# Altium PCB FA TOOL 20131212_V2.0.PcbDoc (part 1 of 2)
Units mm, origin at the board's own origin, x right, y up, seen from the top; angles counter-clockwise.
Board outline 121.5 x 90 mm, 4 copper layers (Top Layer, Mid-Layer 1, Mid-Layer 2, Bottom Layer); 249 components, 157 nets, 678 pads, 153 vias.
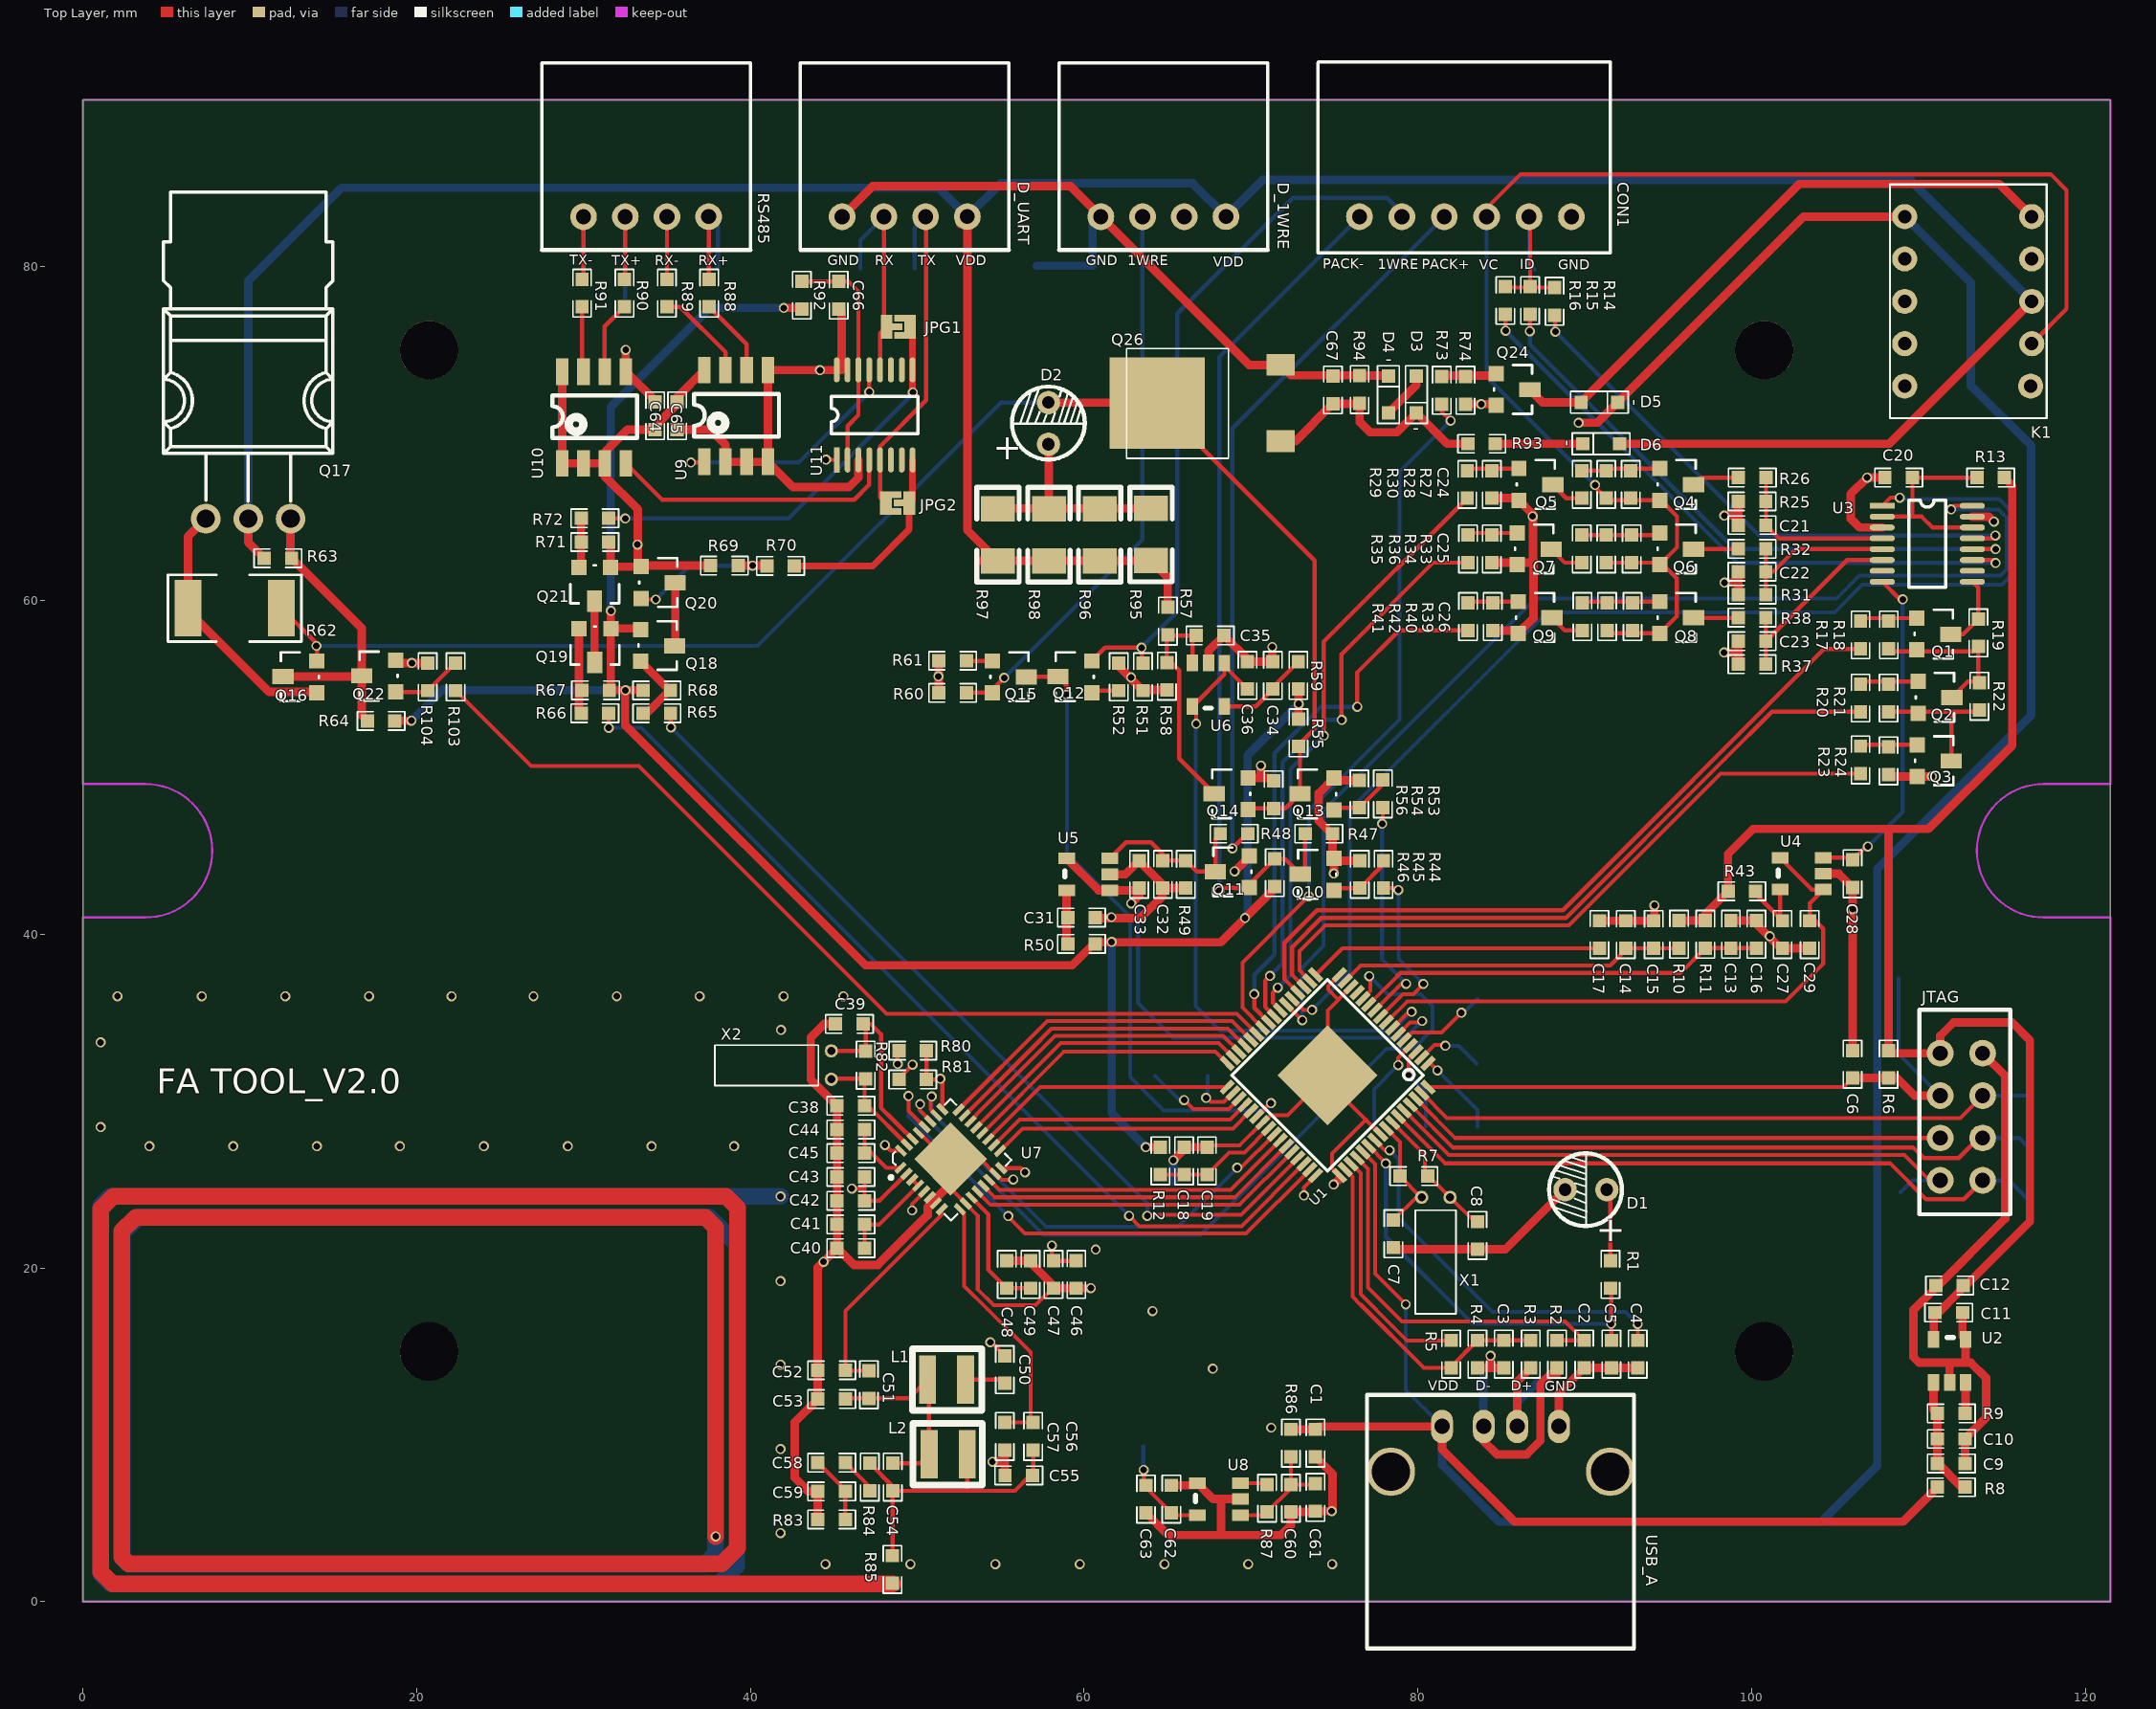
[diagram p0: Top Layer view]
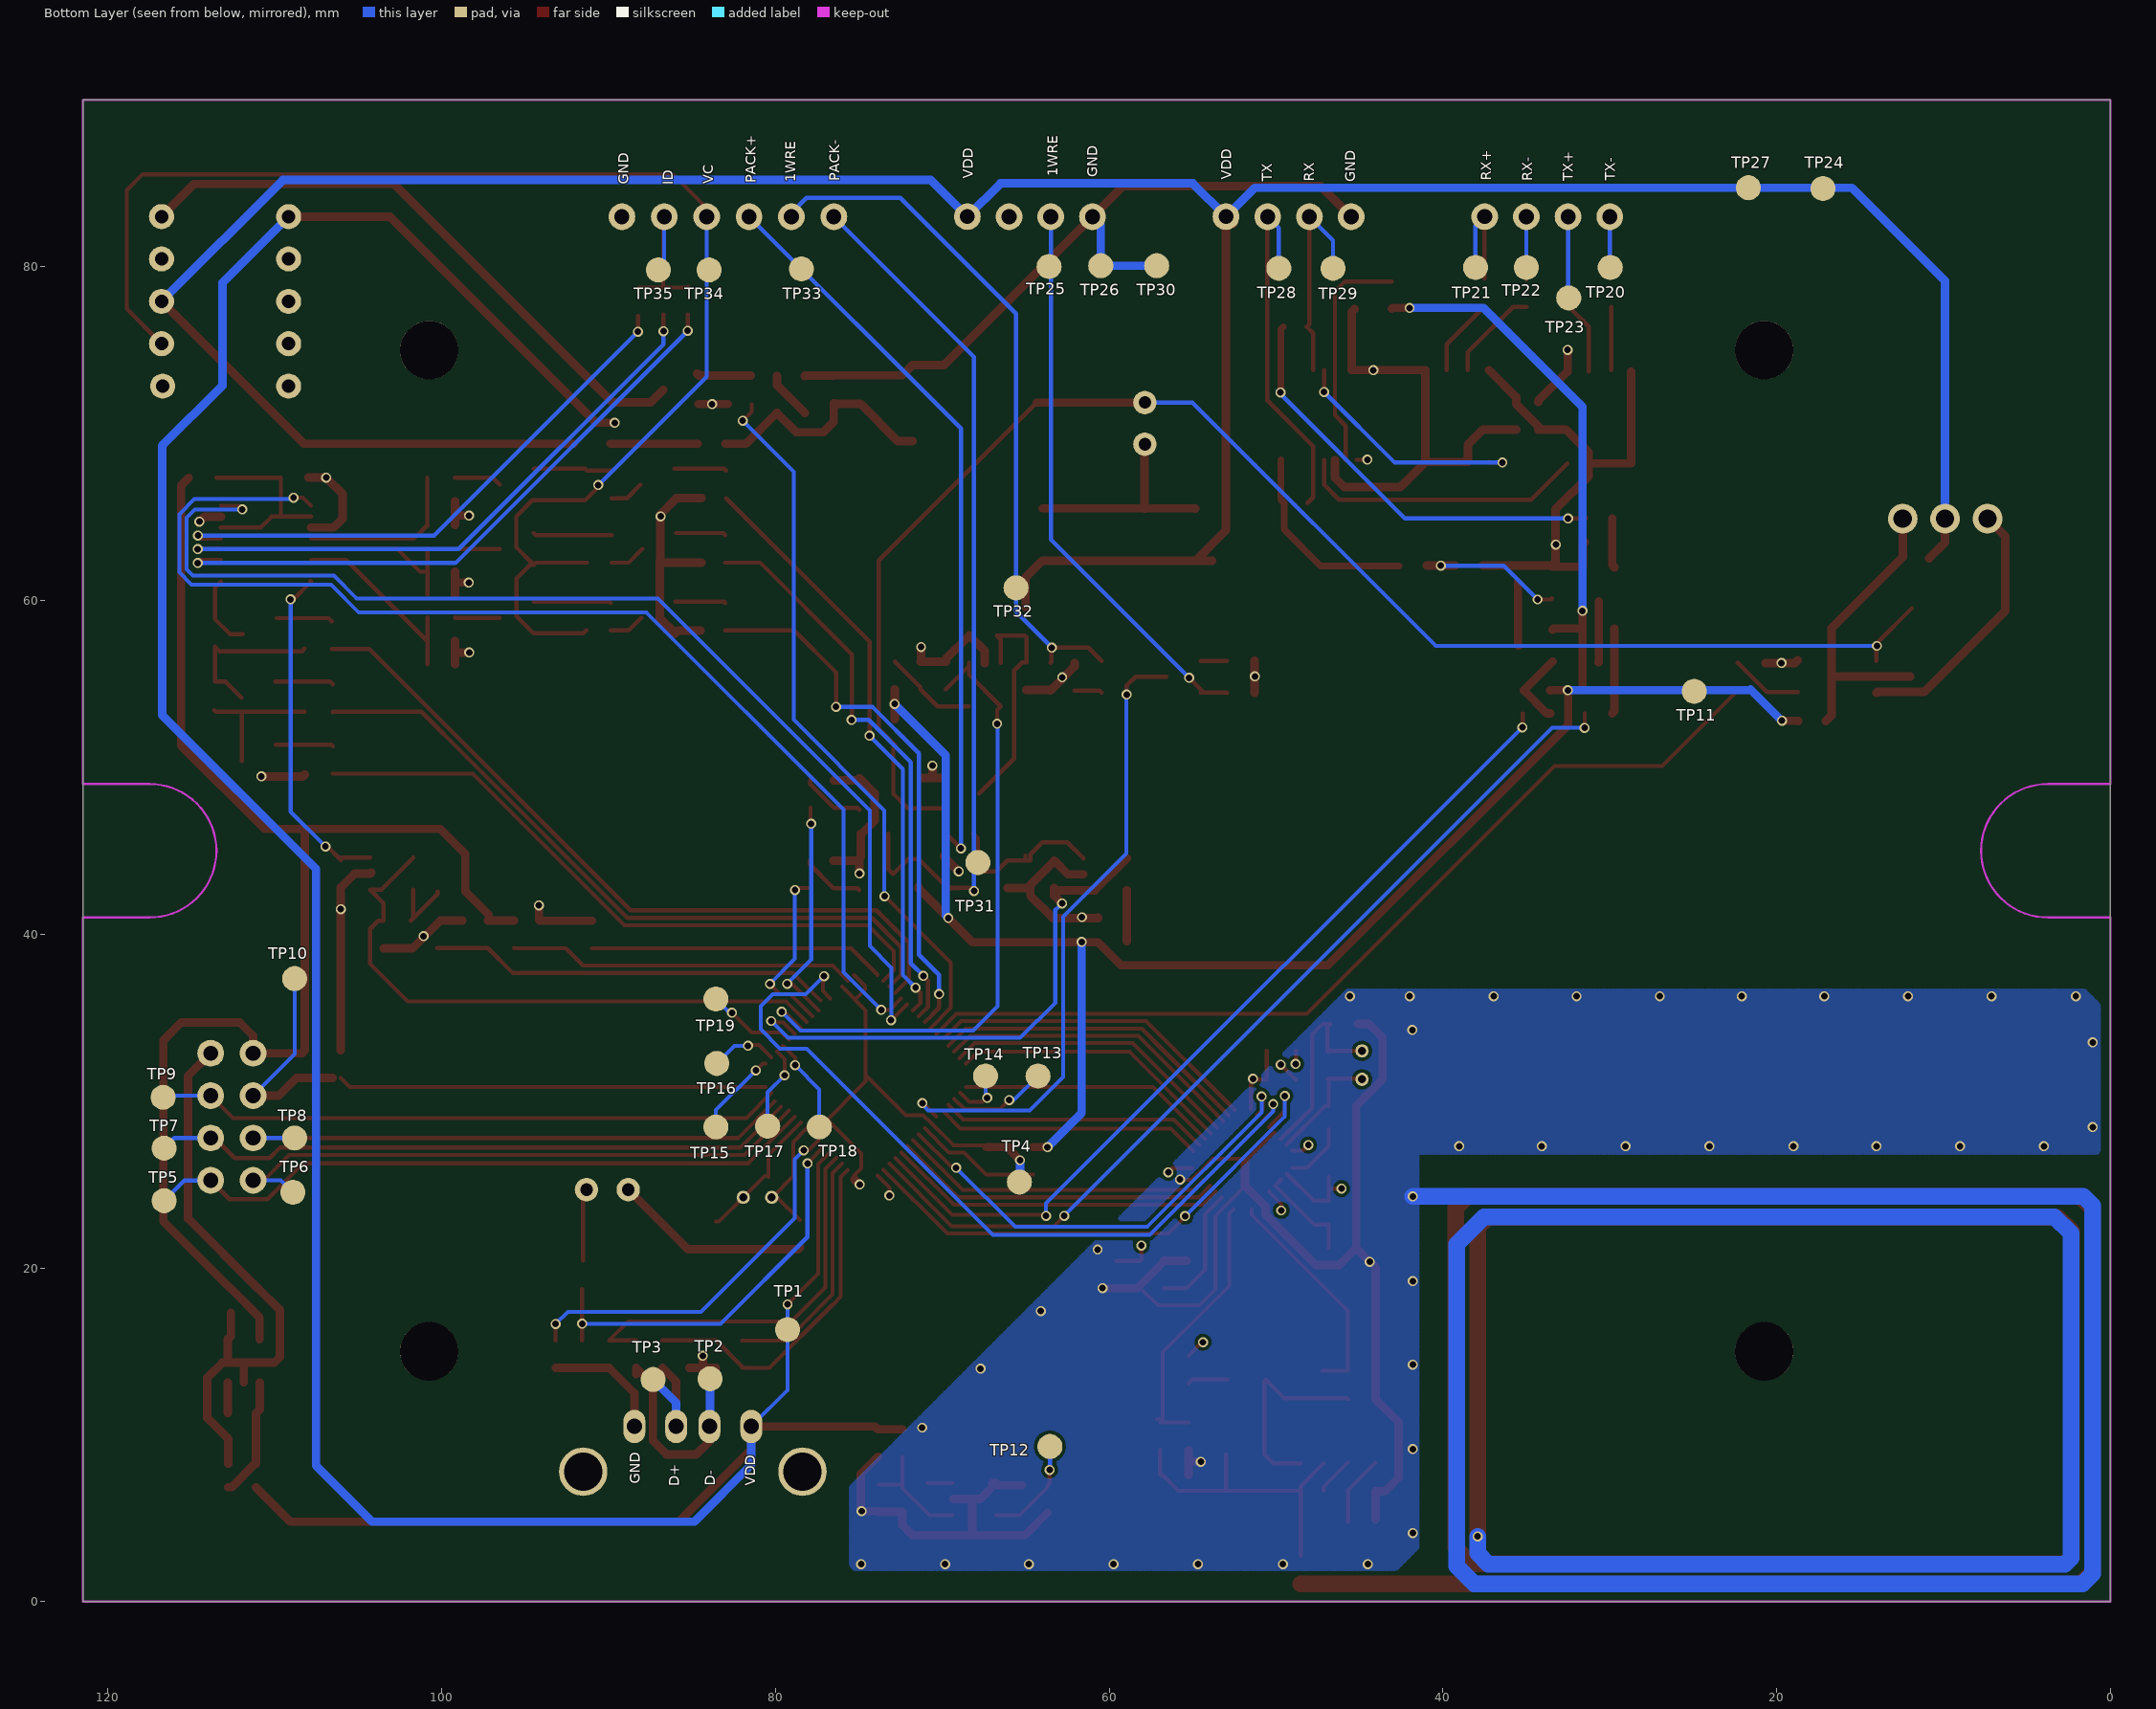
[diagram p1: Bottom Layer view, seen from below]
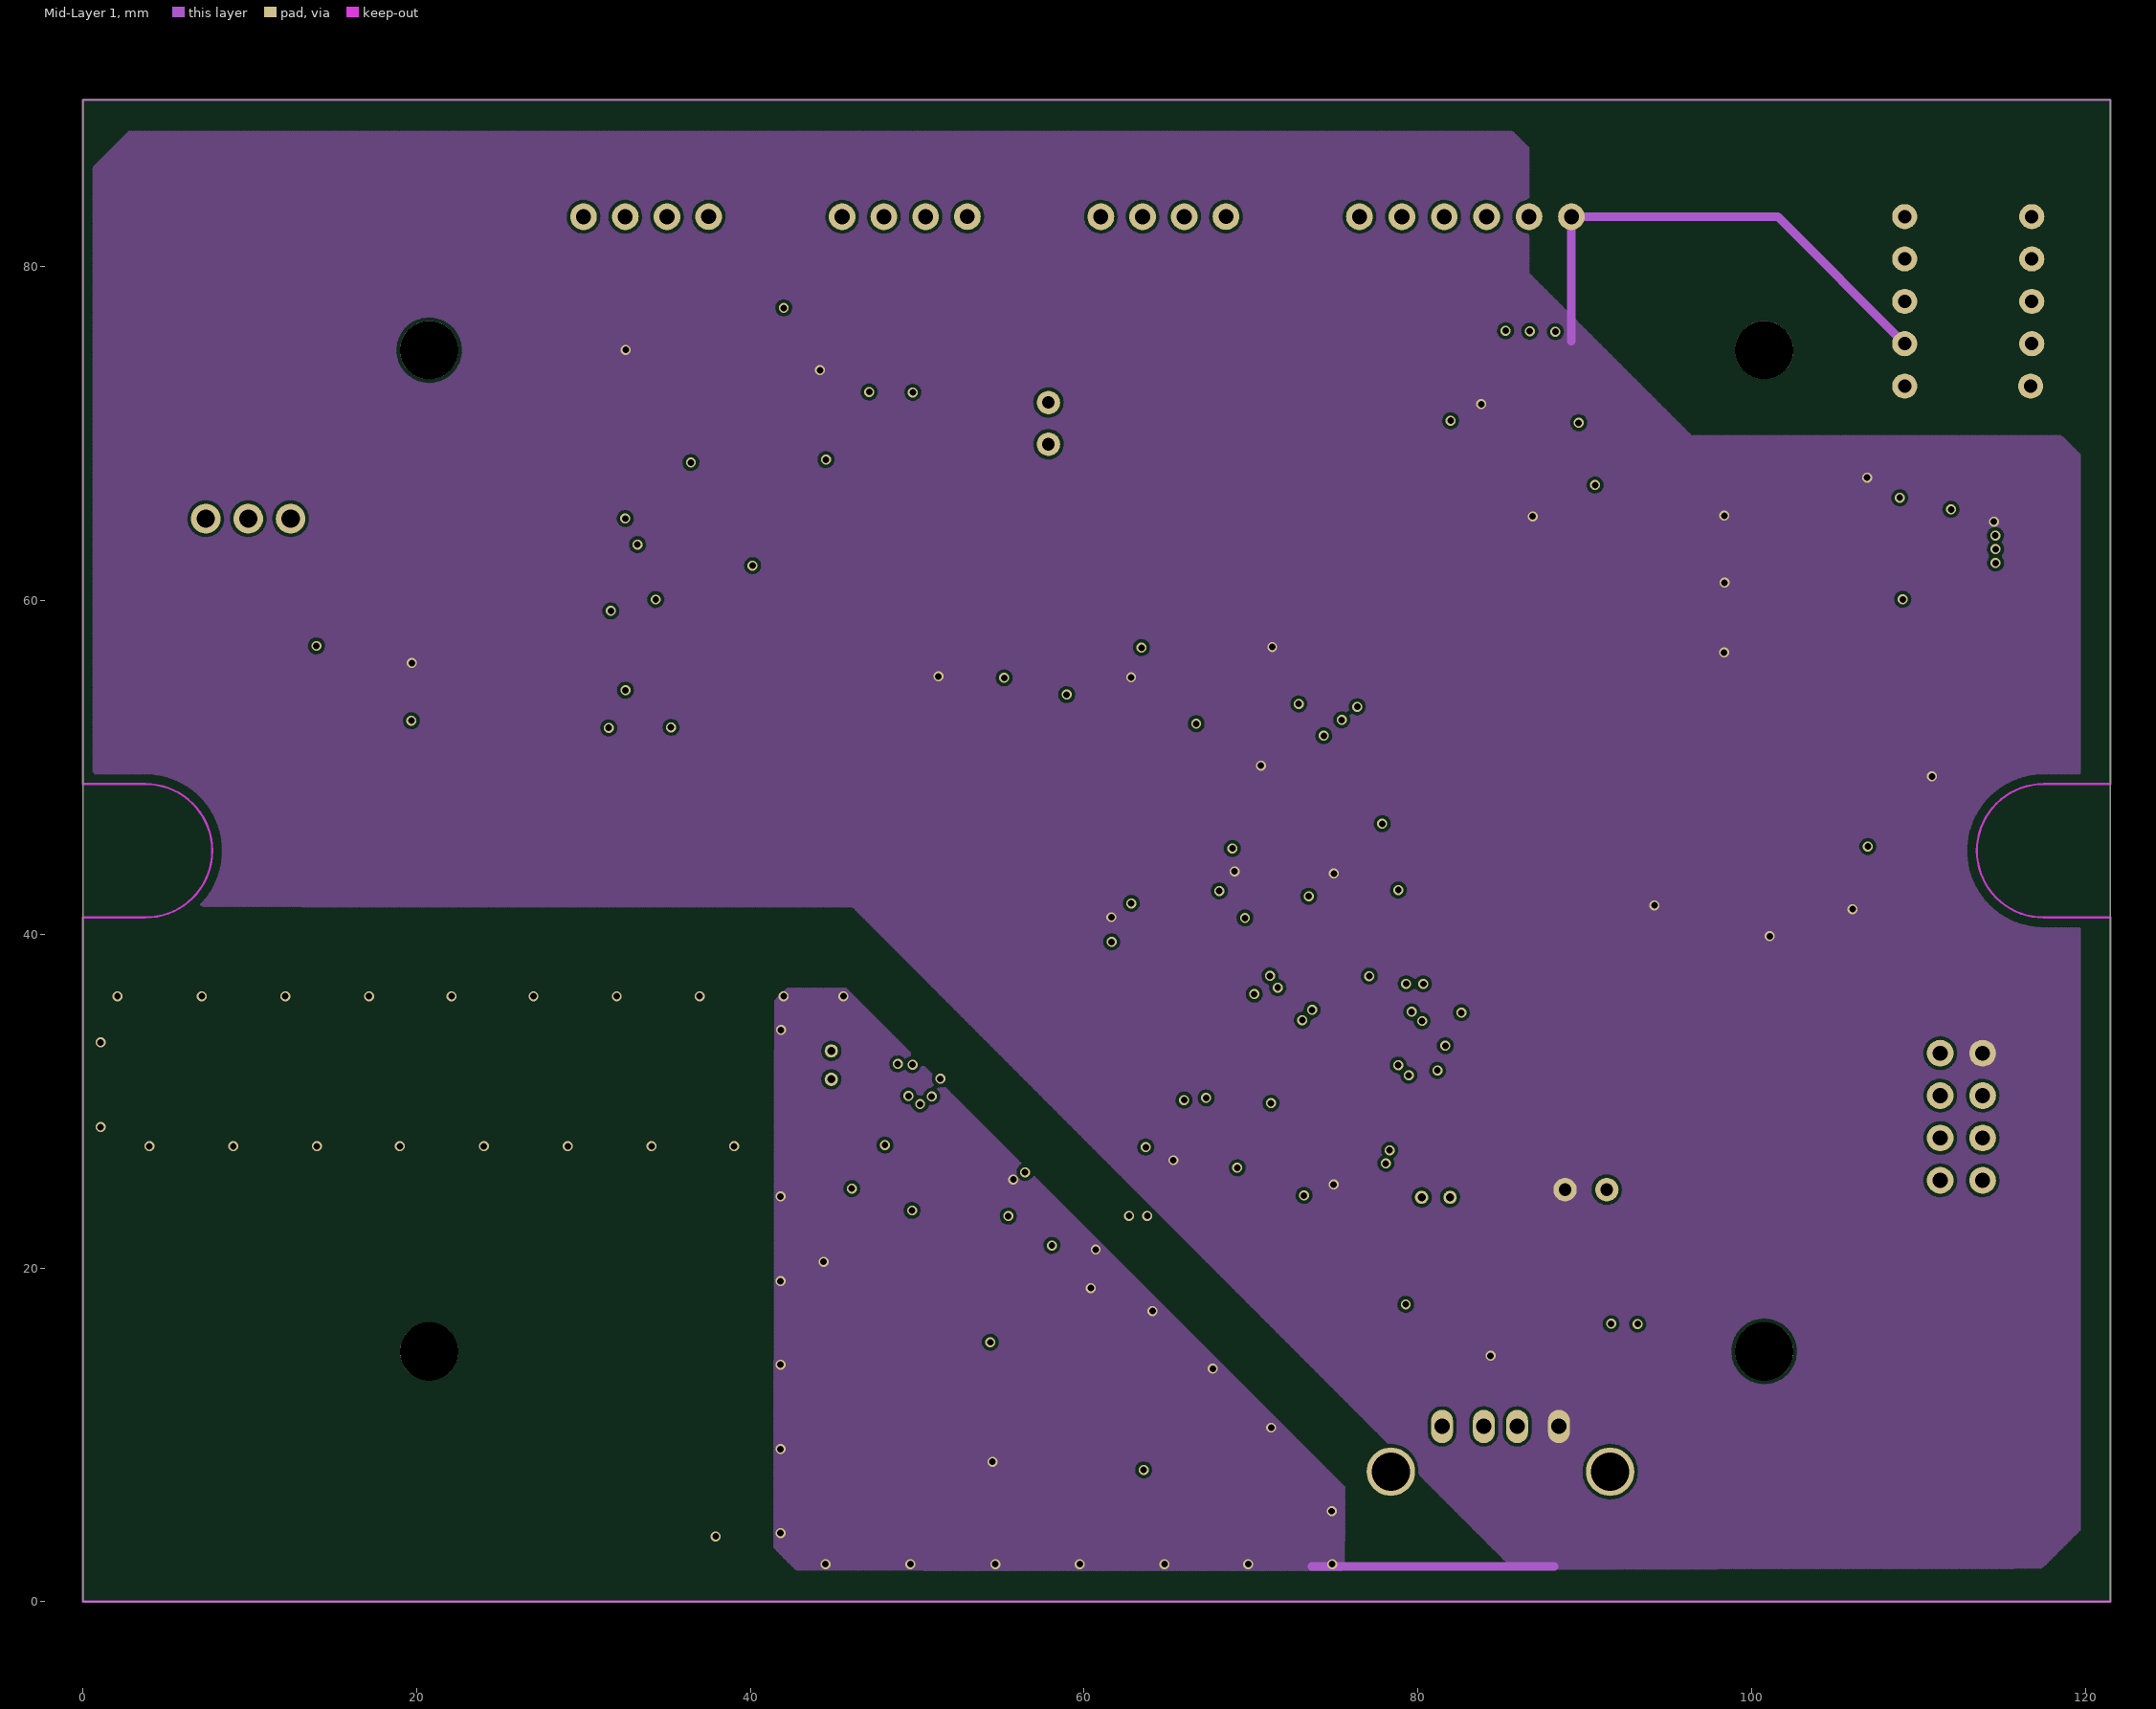
[diagram p2: Mid-Layer 1]
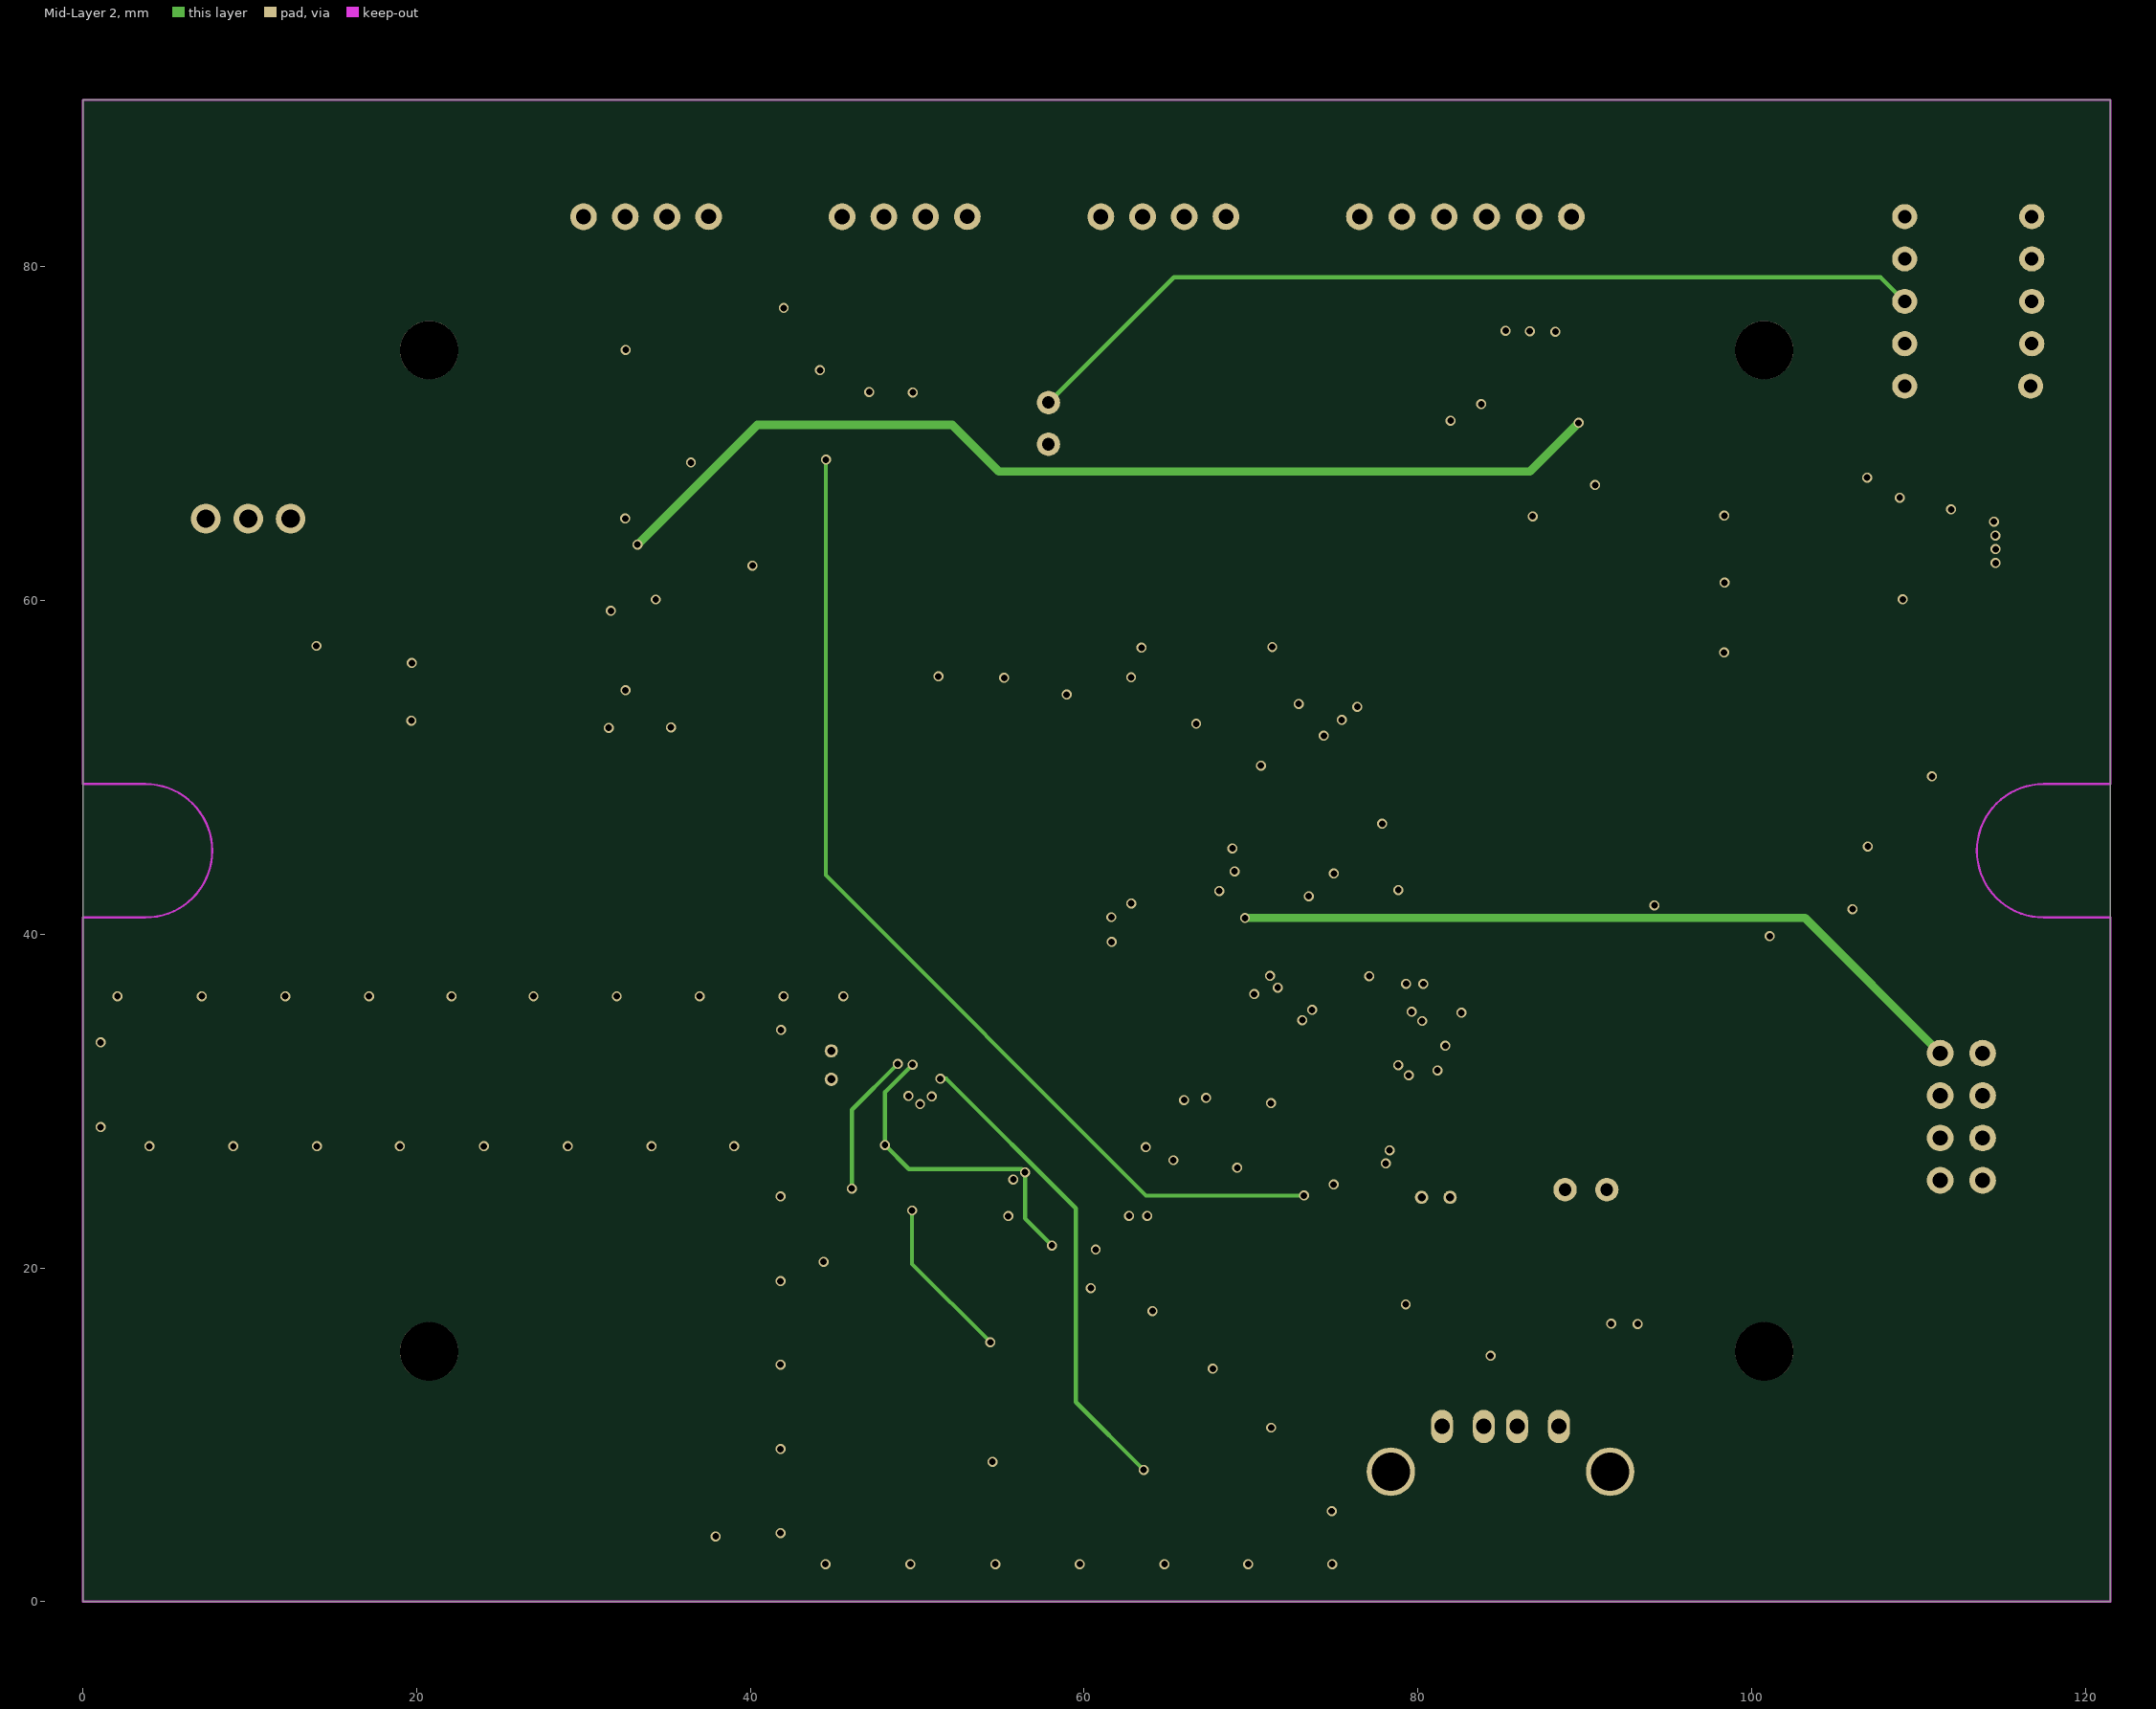
[diagram p3: Mid-Layer 2]

## Layer stack, top to bottom
Top Layer: signal copper 0.0356
Dielectric: core 0.32, FR-4, Dk 4.8
Mid-Layer 1: signal copper 0.0356
Dielectric: prepreg 0.32, FR-4, Dk 4.8
Mid-Layer 2: signal copper 0.0356
Dielectric: core 0.32, FR-4, Dk 4.8
Bottom Layer: signal copper 0.0356

## Board outline
0,90 121.5,90 121.5,0 0,0

## Design rules (kind name [scope] priority, off if disabled: settings)
Clearance keepout [OnLayer('Keep-Out Layer')] p1: gap=0.508
Clearance PAD [(InPadClass('All Pads')) vs (InPadClass('All Pads'))] p2: gap=0.254
Clearance [All] p3: gap=0.203
Clearance GND [InNet('GND') vs InNet('GND')] p4: gap=0.203
ComponentClearance [All] p1 off: gap=0.254 collisioncheckmode=3 verticalgap=0.254 showdistances=FALSE
HoleSize [All] p1: absolutevalues=TRUE maxlimit=3.6 minlimit=0.025 maxpercent=80.000 minpercent=20.000
PlaneConnect [All] p1: planeconnectstyle=Direct reliefexpansion=0.508 reliefentries=4 reliefconductorwidth=0.254 reliefairgap=0.254
PolygonConnect [All] p1: connectstyle=Direct reliefconductorwidth=0.254 reliefentries=4 polygonreliefangle="90 Angle"
RoutingVias [All] p1: holewidth=0.4 width=0.6 viastyle="Through Hole" minholewidth=0.4 minwidth=0.6 maxholewidth=0.4 maxwidth=1.27
SilkscreenOverComponentPads [All] p1: minsilkscreentomaskgap=0.254
SolderMaskExpansion [All] p1: expansion=0.102
Width [All] p1: maxlimit=3 minlimit=0.203 preferedwidth=0.254
24 further rules are at their usual default settings.

## Components (designator, comment, footprint, x,y, rotation, side; value= is the part's Value field where it differs from the comment)
C1 "4.7UF" 0603 73.863,9.5 r90 top
C2 "10PF" 0603 89.967,14.834 r270 top
C3 "10PF" 0603 85.141,14.834 r270 top
C4 "0.22UF" 0603 93.167,14.834 r90 top
C5 "0.22UF" 0603 91.592,14.834 r90 top
C6 "2200PF" 0603 106.045,32.207 r270 top
C7 "10PF" 0603 78.537,22.047 r90 top
C8 "10PF" 0603 83.566,21.946 r270 top
C9 "0.1uF" 0603 111.963,8.28 r180 top
C10 "1UF" 0603 111.963,9.754 r180 top
C11 "0.1uF" 0603 111.811,17.323 r180 top
C12 "1uF" 0603 111.862,18.948 r0 top
C13 "0.1uF" 0603 98.755,39.992 r90 top
C14 "0.1uF" 0603 92.456,39.98 r90 top
C15 "10uF" 0603 94.132,39.98 r90 top
C16 "10uF" 0603 100.279,39.992 r90 top
C17 "0.47uF" 0603 90.881,39.98 r270 top
C18 "10uF" 0603 65.989,26.416 r90 top
C19 "0.1uF" 0603 67.361,26.416 r90 top
C20 "0.1uF" 0603 108.814,67.361 r0 top
C21 "0.1uF" 0603 100.025,64.516 r180 top
C22 "0.1uF" 0603 100.025,61.722 r180 top
C23 "0.1uF" 0603 100.025,57.556 r180 top
C24 "0.1uF" 0603 92.761,66.954 r90 top
C25 "0.1uF" 0603 92.812,63.094 r90 top
C26 "0.1uF" 0603 92.862,59.03 r90 top
C27 "0.1uF" 0603 101.854,39.98 r270 top
C28 "0.1uF" 0603 106.045,43.625 r270 top
C29 "0.1uF" 0603 103.48,39.98 r270 top
C31 "0.1uF" 0603 59.842,40.996 r0 top
C32 "0.1uF" 0603 64.719,43.586 r270 top
C33 "0.1uF" 0603 63.297,43.586 r90 top
C34 "0.1uF" 0603 71.31,55.512 r90 top
C35 "0.1uF" 0603 67.551,57.899 r0 top
C36 "0.1uF" 0603 69.787,55.512 r90 top
C38 "27PF" 0603 46.017,29.718 r0 top
C39 "27PF" 0603 45.928,34.62 r180 top
C40 "0.01uF" 0603 46.017,21.184 r180 top
C41 "2.2uF" 0603 46.017,22.606 r180 top
C42 "0.01uF" 0603 46.017,24.028 r180 top
C43 "2.2uF" 0603 46.017,25.451 r180 top
C44 "0.01uF" 0603 46.017,28.296 r180 top
C45 "2.2uF" 0603 46.017,26.873 r180 top
C46 "2.2uF" 0603 59.53,19.609 r270 top
C47 "0.01uF" 0603 58.158,19.609 r270 top
C48 "2.2uF" 0603 55.364,19.609 r90 top
C49 "0.01uF" 0603 56.787,19.609 r90 top
C50 "TBD" 0603 55.244,13.906 r90 top
C51 "TBD" 0603 47.103,13.005 r90 top
C52 "TBD" 0603 44.868,13.868 r180 top
C53 "TBD" 0603 44.868,12.141 r180 top
C54 "TBD" 0603 48.525,7.468 r90 top
C55 "TBD" 0603 56.083,7.569 r180 top
C56 "TBD" 0603 56.947,9.906 r90 top
C57 "TBD" 0603 55.243,9.906 r270 top
C58 "TBD" 0603 44.868,8.331 r0 top
C59 "TBD" 0603 44.868,6.604 r180 top
C60 "0.1uF" 0603 72.39,6.198 r90 top
C61 "1UF" 0603 73.863,6.248 r90 top
C62 "0.1uF" 0603 65.227,6.147 r270 top
C63 "1uF" 0603 63.703,6.147 r90 top
C64 "0.1uF" 0603 34.29,71.069 r90 top
C65 "0.1uF" 0603 35.611,71.069 r270 top
C66 "0.1uF" 0603 45.292,78.295 r90 top
C67 "0.1UF" 0603 74.905,72.619 r270 top
CON1 "CHG&VC" CON6/2.54 76.5,83 r270 top locked
D1 "LED" L-424 90.068,24.689 r90 top
D2 "LED" L-424 57.861,70.612 r0 top
D3 "ZD15V" SOD-323 79.908,72.339 r270 top
D4 "ZD15V" SOD-323 78.232,72.339 r90 top
D5 "1SS355" SOD-323 90.881,71.882 r0 top
D6 "1SS355" SOD-323 90.983,69.393 r180 top
D_1WRE "CON4" CON4/2.5 68.5,83.005 r0 top locked
D_UART "CON4" CON4/2.5 53,83.005 r0 top locked
JPG1 "S2" JPG 48.87,76.403 r180 top
JPG2 "S1" JPG 48.819,65.837 r0 top
JTAG "4*2P" CON8/2.54 113.843,25.248 r270 top
K1 "TBD" A-RELAY 116.789,83.007 r270 top
L1 "TBD1008" CFL1008 50.608,13.297 r270 top
L2 "TBD1008" CFL1008 52.996,8.839 r90 top
Q1 "2N7002K" SOT-23 110.909,57.988 r270 top
Q2 "2N7002K" SOT-23 110.985,54.191 r270 top
Q3 "2N7002K" SOT-23 110.947,50.394 r270 top
Q4 "TP0610K" SOT-23 95.504,66.954 r270 top
Q5 "2N7002K" SOT-23 87.071,66.954 r270 top
Q6 "TP0610K" SOT-23 95.504,63.094 r270 top
Q7 "2N7002K" SOT-23 86.97,63.094 r270 top
Q8 "TP0610K" SOT-23 95.504,58.979 r270 top
Q9 "2N7002K" SOT-23 87.02,58.979 r270 top
Q10 "2N7002K" SOT-23 73.965,43.586 r90 top
Q11 "2N7002K" SOT-23 68.885,43.739 r90 top
Q12 "TP0610K" SOT-23 59.436,55.423 r90 top
Q13 "2N7002K" SOT-23 73.952,48.4 r90 top
Q14 "2N7002K" SOT-23 68.809,48.412 r90 top
Q15 "TP0610K" SOT-23 55.524,55.423 r270 top
Q16 "2N3904" SOT-23 13.005,55.423 r90 top
Q17 "TBD/TIP1XX" TO220 9.906,73.203 r180 top
Q18 "2N7002K" SOT-23 34.442,57.302 r270 top
Q19 "2N7002K" SOT-23 30.683,57.302 r180 top
Q20 "2N7002K" SOT-23 34.48,61.074 r270 top
Q21 "2N7002K" SOT-23 30.67,60.973 r180 top
Q22 "2N7002K" SOT-23 17.716,55.474 r90 top
Q24 "2N7002K" SOT-23 85.7,72.644 r270 top
Q26 "TO252" TO252 68.072,71.831 r90 top
R1 "330R" 0603 91.542,19.609 r90 top
R2 "10R" 0603 88.341,14.834 r270 top
R3 "10R" 0603 86.766,14.834 r90 top
R4 "1M" 0603 83.566,14.834 r270 top
R5 "1K" 0603 81.991,14.834 r90 top
R6 "10K" 0603 108.204,32.207 r270 top
R7 "1M" 0603 79.756,25.502 r180 top
R8 "10R" 0603 111.963,6.858 r0 top
R9 "100K" 0603 111.963,11.278 r180 top
R10 "10R" 0603 95.656,39.992 r270 top
R11 "10R" 0603 97.231,39.992 r90 top
R12 "10R" 0603 64.567,26.416 r270 top
R13 "10R" 0603 114.325,67.361 r180 top
R14 "100K" 0603 88.189,77.927 r90 top
R15 "330K" 0603 86.716,77.978 r90 top
R16 "680K" 0603 85.242,77.978 r90 top
R17 "1K" 0603 106.528,57.937 r90 top
R18 "100K" 0603 108.217,57.937 r90 top
R19 "100K" 0603 113.589,58.064 r270 top
R20 "1K" 0603 106.528,54.153 r90 top
R21 "100K" 0603 108.204,54.153 r90 top
R22 "100K" 0603 113.64,54.254 r270 top
R23 "1K" 0603 106.528,50.444 r90 top
R24 "100K" 0603 108.204,50.394 r90 top
R25 "1K" 0603 100.025,65.938 r0 top
R26 "15K" 0603 100.038,67.361 r0 top
R27 "510K" 0603 91.288,66.954 r270 top
R28 "1M" 0603 89.814,66.954 r270 top
R29 "1K" 0603 82.956,66.954 r90 top
R30 "100K" 0603 84.43,66.954 r90 top
R31 "1K" 0603 100.025,60.35 r0 top
R32 "22K" 0603 100.025,63.094 r0 top
R33 "510K" 0603 91.288,63.094 r270 top
R34 "1M" 0603 89.814,63.094 r270 top
R35 "1K" 0603 83.007,63.094 r90 top
R36 "100K" 0603 84.43,63.094 r90 top
R37 "1K" 0603 100.025,56.185 r0 top
R38 "30K" 0603 100.025,58.979 r0 top
R39 "510K" 0603 91.338,59.03 r270 top
R40 "1M" 0603 89.865,59.03 r270 top
R41 "1K" 0603 83.007,59.03 r90 top
R42 "100K" 0603 84.48,59.03 r90 top
R43 "10R" 0603 99.416,42.57 r180 top
R44 "1K" 0603 77.94,43.586 r90 top
R45 "100K" 0603 76.517,43.586 r90 top
R46 "1K" 0603 71.425,43.688 r90 top
R47 "100K" 0603 74.066,46.025 r0 top
R48 "2M2" 0603 68.986,46.025 r180 top
R49 "100K" 0603 66.091,43.586 r90 top
R50 "10R" 0603 59.842,39.421 r180 top
R51 "1K" 0603 63.525,55.423 r90 top
R52 "0R" 0603 62.078,55.423 r270 top
R53 "1K" 0603 77.902,48.412 r90 top
R54 "100K" 0603 76.492,48.4 r90 top
R55 "1K" 0603 72.847,52.07 r270 top
R56 "100K" 0603 71.349,48.362 r90 top
R57 "2M2" 0603 65.011,58.763 r270 top
R58 "100K" 0603 64.96,55.461 r90 top
R59 "10R" 0603 72.834,55.512 r90 top
R60 "1K" 0603 52.121,54.458 r0 top
R61 "0R" 0603 52.121,56.388 r0 top
R62 "TBD/2512" 2512 9.093,59.538 r0 top
R63 "TBD/ NC" 0603 11.684,62.535 r0 top
R64 "1K" 0603 17.869,52.781 r0 top
R65 "10R" 0603 34.392,53.238 r0 top
R66 "10R" 0603 30.683,53.238 r0 top
R67 "3.3K" 0603 30.721,54.623 r180 top
R68 "3.3K" 0603 34.392,54.61 r0 top
R69 "3.3K" 0603 38.443,62.09 r0 top
R70 "10R" 0603 41.808,62.078 r0 top
R71 "3.3K" 0603 30.683,63.5 r180 top
R72 "10R" 0603 30.683,64.922 r0 top
R73 "1K" 0603 81.432,72.593 r90 top
R74 "100K" 0603 82.855,72.593 r90 top
R80 "10R" 0603 49.726,33.02 r180 top
R81 "10R" 0603 49.726,31.293 r180 top
R82 "1M" 0603 46.906,32.156 r270 top
R83 "TBD" 0603 44.868,4.928 r0 top
R84 "0R" 0603 47.154,7.468 r90 top
R85 "0R" 0603 48.514,1.93 r270 top
R86 "10R" 0603 72.39,9.5 r270 top
R87 "100K" 0603 70.968,6.198 r270 top
R88 "10R" 0603 37.532,78.422 r90 top
R89 "10R" 0603 34.992,78.422 r90 top
R90 "10R" 0603 32.452,78.422 r90 top
R91 "10R" 0603 29.912,78.422 r90 top
R92 "10R" 0603 43.078,78.295 r270 top
R93 "100K" 0603 83.82,69.393 r180 top
R94 "100K" 0603 76.505,72.644 r90 top
R95 "22K/1206" 1206 64.008,63.805 r90 top
R96 "22K/1206" 1206 60.935,63.792 r90 top
R97 "22K/1206" 1206 54.839,63.792 r90 top
R98 "22K/1206" 1206 57.887,63.792 r90 top
R103 "1K" 0603 22.339,55.423 r270 top
R104 "100K" 0603 20.663,55.423 r270 top
RS485 "P=2.5MM" CON4/2.5 37.5,83.005 r0 top locked
TP1 "IMPORTANT TP" T-1.5 79.273,16.307 r180 bottom
TP2 "IMPORTANT TP" T-1.5 83.922,13.36 r270 bottom
TP3 "IMPORTANT TP" T-1.5 87.325,13.31 r270 bottom
TP4 "IMPORTANT TP" T-1.5 65.38,25.146 r270 bottom
TP5 "IMPORTANT TP" T-1.5 116.637,24.028 r270 bottom
TP6 "IMPORTANT TP" T-1.5 108.915,24.536 r270 bottom
TP7 "IMPORTANT TP" T-1.5 116.637,27.178 r270 bottom
TP8 "IMPORTANT TP" T-1.5 108.814,27.788 r270 bottom
TP9 "IMPORTANT TP" T-1.5 116.688,30.226 r270 bottom
TP10 "IMPORTANT TP" T-1.5 108.814,37.338 r270 bottom
TP11 "IMPORTANT TP" T-1.5 24.943,54.559 r270 bottom
TP12 "IMPORTANT TP" T-1.5 63.551,9.296 r270 bottom
TP13 "IMPORTANT TP" T-1.5 64.262,31.496 r270 bottom
TP14 "IMPORTANT TP" T-1.5 67.412,31.496 r270 bottom
TP15 "IMPORTANT TP" T-1.5 83.566,28.448 r270 bottom
TP16 "IMPORTANT TP" T-1.5 83.515,32.258 r270 bottom
TP17 "IMPORTANT TP" T-1.5 80.467,28.499 r270 bottom
TP18 "IMPORTANT TP" T-1.5 77.368,28.448 r270 bottom
TP19 "IMPORTANT TP" T-1.5 83.566,36.119 r270 bottom
TP20 "IMPORTANT TP" T-1.5 29.972,79.959 r270 bottom
TP21 "IMPORTANT TP" T-1.5 38.049,79.959 r270 bottom
TP22 "IMPORTANT TP" T-1.5 35.001,79.959 r270 bottom
TP23 "IMPORTANT TP" T-1.5 32.461,78.13 r270 bottom
TP24 "IMPORTANT TP" T-1.5 17.221,84.684 r270 bottom
TP25 "IMPORTANT TP" T-1.5 63.602,80.01 r270 bottom
TP26 "IMPORTANT TP" T-1.5 60.503,80.061 r270 bottom
TP27 "IMPORTANT TP" T-1.5 21.692,84.734 r270 bottom
TP28 "IMPORTANT TP" T-1.5 49.835,79.908 r270 bottom
TP29 "IMPORTANT TP" T-1.5 46.584,79.908 r270 bottom
TP30 "IMPORTANT TP" T-1.5 57.15,80.061 r270 bottom
TP31 "IMPORTANT TP" T-1.5 67.869,44.298 r270 bottom
TP32 "IMPORTANT TP" T-1.5 65.583,60.757 r270 bottom
TP33 "IMPORTANT TP" T-1.5 78.446,79.866 r270 bottom
TP34 "IMPORTANT TP" T-1.5 83.972,79.807 r270 bottom
TP35 "IMPORTANT TP" T-1.5 87.02,79.807 r270 bottom
U1 "MSP430F5510" MSP430F5510 80.315,31.547 r225 top
U2 "ADP122-3.3V" SOT-23-5 111.862,14.427 r270 top
U3 "ADG1609" TSSOP-16 110.528,63.398 r0 top
U4 "OPA376" SOT-23-5 102.997,43.625 r0 top
U5 "OPA376" SOT-23-5 60.249,43.586 r0 top
U6 "OPA376" SOT-23-5 67.45,54.953 r90 top
U7 "TRF7970A" "QFN THIN-N32" 51.999,26.479 r315 top
U8 "ADP122-3.3V" SOT-23-5 68.072,6.147 r0 top
U9 "ADM3072EARZ" SO-8 39.141,71.056 r90 top
U10 "ADM3072EARZ" SO-8 30.632,70.968 r90 top
U11 "ADG1609" TSSOP-16 47.447,71.12 r90 top
USB_A "USB" "USB-A TYPE" 81.45,10.5 r0 top locked
X1 "4M" CRYSTAL 81.077,24.232 r180 top
X2 "13.56M" CRYSTAL 44.849,32.156 r270 top

## Footprints (in the part's own frame and the unit in brackets; to place one, negate y for a bottom-side part, rotate by r counter-clockwise, add the part's x,y. Pads: shape width x height; smd on the part's side, far side on the other; paste and mask are expansions set on the pad)
0603 [mm]
  rect 0.8x0.8 smd: 1(-0.825,0) 2(0.825,0)
  silkscreen extent -1.42,-0.55 1.43,0.55
1206 [mm]
  rect 1.52x2.03 smd: 1(-1.415,0) 2(1.715,0)
  silkscreen extent -2.68,-1.27 2.98,1.27
2512 [mm]
  rect 1.6x3.4 smd: 1(-2.8,0) 2(2.8,0)
  silkscreen extent -4,-2 4,2
A-RELAY [mm]
  round 1.5 hole 0.8: 1(0,0) 2(2.54,0) 3(5.08,0) 4(7.62,0) 5(10.16,-0.073) 6(10.16,-7.62) 7(7.62,-7.62) 8(5.08,-7.62) 9(2.54,-7.62) 10(0,-7.62)
  silkscreen extent -1.92,-8.5 12.08,0.89
CFL1008 [mm]
  rect 2.9x1.015 smd: 1(0,0) 2(0,2.285)
  silkscreen extent -1.85,-0.9 1.85,3.25
CON4/2.5 [mm]
  round 1.6 hole 0.9: 1(0,0) 2(-2.5,-0.005) 3(-5,-0.005) 4(-7.5,-0.005)
  silkscreen extent -10,-2 2.5,9.2
CON6/2.54 [mm]
  round 1.6 hole 0.9: 1(0,0) 2(0,2.54) 3(0,5.08) 4(0,7.62) 5(0,10.16) 6(0,12.7)
  silkscreen extent -9.28,-2.5 2.18,15.04
CON8/2.54 [mm]
  round 1.6 hole 0.9: 1(0,0) 2(0,-2.54) 3(-2.54,0) 4(-2.54,-2.54) 5(-5.08,0) 6(-5.08,-2.54) 7(-7.62,0) 8(-7.62,-2.54)
  silkscreen extent -10.22,-3.78 2.03,1.65
CRYSTAL [mm]
  round 0.8 hole 0.5: 1(0.85,0) 2(-0.85,0)
  silkscreen extent -1.2,0.78 1.23,6.97
JPG [mm]
  rect 0.7x1.41 smd: 1(-0.705,0) 2(0.705,0)
  rect 0.6x0.4 smd: 1(-0.062,0.506) 1(-0.062,-0.506) 2(0.064,0.002)
L-424 [mm]
  round 1.4 hole 0.75: 1(0,1.25) 2(0,-1.25)
  silkscreen extent -2.18,-2.16 2.18,2.21
MSP430F5510 [mm]
  rect 4.25x4.25 smd: 0(4.05,-4.05)
  rect 1x0.35 smd: 1(-0.7,-0.3) 2(-0.7,-0.8) 3(-0.7,-1.3) 4(-0.7,-1.8) 5(-0.7,-2.3) 6(-0.7,-2.8) 7(-0.7,-3.3) 8(-0.7,-3.8) 9(-0.7,-4.3) 10(-0.7,-4.8) 11(-0.7,-5.3) 12(-0.7,-5.8) 13(-0.7,-6.3) 14(-0.7,-6.8) 15(-0.7,-7.3) 16(-0.7,-7.8) 33(8.8,-7.8) 34(8.8,-7.3) 35(8.8,-6.8) 36(8.8,-6.3) 37(8.8,-5.8) 38(8.8,-5.3) 39(8.8,-4.8) 40(8.8,-4.3) 41(8.8,-3.8) 42(8.8,-3.3) 43(8.8,-2.8) 44(8.8,-2.3) 45(8.8,-1.8) 46(8.8,-1.3) 47(8.8,-0.8) 48(8.8,-0.3)
  rect 0.35x1 smd: 17(0.3,-8.8) 18(0.8,-8.8) 19(1.3,-8.8) 20(1.8,-8.8) 21(2.3,-8.8) 22(2.8,-8.8) 23(3.3,-8.8) 24(3.8,-8.8) 25(4.3,-8.8) 26(4.8,-8.8) 27(5.3,-8.8) 28(5.8,-8.8) 29(6.3,-8.8) 30(6.8,-8.8) 31(7.3,-8.8) 32(7.8,-8.8) 49(7.8,0.7) 50(7.3,0.7) 51(6.8,0.7) 52(6.3,0.7) 53(5.8,0.7) 54(5.3,0.7) 55(4.8,0.7) 56(4.3,0.7) 57(3.8,0.7) 58(3.3,0.7) 59(2.8,0.7) 60(2.3,0.7) 61(1.8,0.7) 62(1.3,0.7) 63(0.8,0.7) 64(0.3,0.7)
  silkscreen extent 0,-8.1 8.1,0
"QFN THIN-N32" [mm]
  rect 0.3x0.8 smd: 1(-1.781,-2.465) 2(-1.281,-2.465) 3(-0.781,-2.465) 4(-0.281,-2.465) 5(0.219,-2.465) 6(0.719,-2.465) 7(1.219,-2.465) 8(1.719,-2.465) 17(1.719,2.465) 18(1.219,2.465) 19(0.719,2.465) 20(0.219,2.465) 21(-0.281,2.465) 22(-0.781,2.465) 23(-1.281,2.465) 24(-1.781,2.465)
  rect 0.8x0.3 smd: 9(2.49,-1.713) 10(2.49,-1.213) 11(2.49,-0.713) 12(2.49,-0.213) 13(2.49,0.287) 14(2.49,0.787) 15(2.49,1.287) 16(2.49,1.787) 25(-2.49,1.787) 26(-2.49,1.287) 27(-2.49,0.787) 28(-2.49,0.287) 29(-2.49,-0.213) 30(-2.49,-0.713) 31(-2.49,-1.213) 32(-2.49,-1.713)
  rect 3.1x3.1 smd: 33(-0.031,0.037)
  silkscreen extent -2.69,-3.33 2.58,2.57
SO-8 [mm]
  rect 1.6x0.76 smd: 1(-2.75,1.905) 2(-2.75,0.635) 3(-2.75,-0.635) 4(-2.75,-1.905) 5(2.75,-1.905) 6(2.75,-0.635) 7(2.75,0.635) 8(2.75,1.905)
  round 0.5 on Top Overlay: 33(-4.177,1.907)
  silkscreen extent -1.23,-2.57 1.31,2.51
SOD-323 [mm]
  rect 0.8x0.8 smd: 1(1.1,0) 2(-1.1,0)
  silkscreen extent -1.72,-0.65 1.73,0.65
SOT-23 [mil]
  rect 36x36 smd: 1(-37.5,-40) 2(37.5,-40)
  rect 36x50 smd: 3(0.5,40)
  silkscreen extent -58,-45 58,45
SOT-23-5 [mm]
  rect 0.99x0.69 smd: 1(1.295,-0.955)
  rect 1x0.69 smd: 2(1.295,0) 3(1.295,0.955) 4(-1.295,0.955) 5(-1.295,-0.955)
  silkscreen extent -1.4,-0.16 -1.4,0.22
T-1.5 [mm]
  round 1.5 smd: 1(0,0)
TO220 [mil]
  round 70 hole 43.31: 1(-100,326.87) 2(100,326.87) 3(0,326.87)
  silkscreen extent -200,-444 200,285
TO252 [mm]
  rect 1.3x1.7 smd: 1(-2.285,-3.7) 2(2.285,-3.7)
  rect 5.5x5.7 smd: 3(0,3.7)
  silkscreen extent -3.32,-0.58 3.26,5.52
TSSOP-16 [mm]
  rect 1.5x0.35 smd: 1(-2.7,2.275)
  oval 1.5x0.35 smd: 2(-2.7,1.625) 3(-2.7,0.975) 4(-2.7,0.325) 5(-2.7,-0.325) 6(-2.7,-0.975) 7(-2.7,-1.625) 8(-2.7,-2.275) 9(2.7,-2.275) 10(2.7,-1.625) 11(2.7,-0.975) 12(2.7,-0.325) 13(2.7,0.325) 14(2.7,0.975) 15(2.7,1.625) 16(2.7,2.275)
  round 0.5 on Top Overlay: 48(-4.02,2.285)
  silkscreen extent -1.12,-2.6 1.12,2.6
"USB-A TYPE" [mm]
  round 2.9 hole 2.3: 0(-3.07,-2.71) 0(10.07,-2.71)
  oval 1.3x2 hole 0.92: 1(7,0) 2(4.5,0) 3(2.5,0) 4(0,0)
  silkscreen extent -4.5,-13.3 11.5,1.88

## Part data
C1 C2 C3 C6 C13 C14 C15 C16 C17 C18 C19 C20 C21 C22 C23 C64 C65 C66: library part Cap, "Capacitor"
C4 C5 C7 C8 C9 C10 C11 C12 C24 C25 C26 C27 C28 C29 C31 C32 C33 C34 C35 C36 C38 C39 C40 C41 C42 C43 C44 C45 C46 C47 C48 C49 C50 C51 C52 C53 C54 C55 C56 C57 C58 C59 C60 C61 C62 C63 C67: library part CAP, "Capacitor"
CON1: library part CON6, "Connector"
D3 D4 D5 D6: library part ZENER2, "Zener Diode"
D_1WRE D_UART: "Connector"
JPG1 JPG2: library part SMALL-SHORT
JTAG: library part CON8, "Connector"
K1: library part RELAY_10P_12V
L1 L2 R2 R3 R4 R5 R6 R7 R8 R9 R10 R11 R12 R13 R14 R15 R16 R17 R18 R19 R20 R21 R22 R23 R24 R25 R26 R27 R28 R29 R30 R31 R32 R33 R34 R35 R36 R37 R38 R39 R40 R41 R42 R43 R44 R45 R46 R47 R48 R49 R50 R51 R52 R53 R54 R55 R56 R57 R58 R59 R60 R61 R62 R63 R64 R65 R66 R67 R68 R69 R70 R71 R72 R73 R74 R80 R81 R82 R83 R84 R85 R86 R87 R88 R89 R90 R91 R92 R93 R94 R95 R96 R97 R98 R103 R104: library part RES
Q1 Q2 Q3 Q5 Q7 Q9 Q10 Q11 Q13 Q14 Q18 Q19 Q20 Q21 Q22 Q24: library part N-MOSFET
Q4 Q6 Q8 Q12 Q15 Q26: library part P-MOSFET
Q16 Q17: library part NPN, "PNP Transistor"
R1: library part RES1
RS485 USB_A: library part CON4, "Connector"
U2 U8: library part ADP121-3.3V
U3 U11: library part DS2760
U4 U5 U6: library part TLV2711CDBV, "Quad 2-INPUT NAND SCHMITT TRIGGER"
U9 U10: library part SN75176
X1 X2: library part Y1

## Free pads (board coordinates)
  round 3.5 hole 3.5 unplated: 0(20.75,15) 0(20.75,75) 0(100.75,15) 0(100.75,75)

## Via types
v1: diameter 0.6, hole 0.4, Top Layer to Bottom Layer, tented both sides, 153 vias

## Nets (pads, with @x,y where several pads share a name; then routed paths per layer and width w, separated by ;. In a path a pad name is that pad's centre, name@x,y a point inside that pad or via, vN(x,y) a via of type N, cw(c..) or ccw(c..) an arc to the next point about the centre after c; other vN are vias at no path point)
"1W C": CON1.2 Q12.2 R51.2 TP32.1 | length 42.1
  Top Layer w0.254: Q12.2@60.452,56.375 61.252,57.175 v1(63.436,57.175) 63.462,57.15 63.462,56.311 R51.2@63.525,56.248
  Bottom Layer w0.254: v1(63.436,57.175) 65.583,59.322 TP32.1@65.583,60.757 65.583,77.191 72.517,84.125 76.026,84.125 76.032,84.13 78.138,84.13 79.04,83.228 CON1.2@79.04,83
1WIRE: Q12.3 Q15.3 U1.38 | length 38.5
  Top Layer w0.23: U1.38@70.345,29.072 71.143,29.87 v1(71.196,29.87)
  Top Layer w0.254: Q15.3@56.566,55.435 Q12.3@58.42,55.435 58.953,54.902 v1(58.953,54.356)
  Bottom Layer w0.23: v1@58.966,54.546 58.966,44.833 62.751,41.048 62.751,31.445 64.77,29.426 70.853,29.426 71.196,29.769 v1(71.196,29.87)
3V3: C11.2 C12.2 JTAG.8 Q18.1 Q19.1 R6.1 R10.1 R11.2 R12.1 R13.1 R43.2 R46.1 R50.1 R55.1 R59.1 R64.2 R67.1 R68.1 R92.2 TP11.1 U2.5 | length 259.4
  Top Layer w0.5: R64.2@18.694,52.781 18.707,52.794 v1(19.685,52.794) ; R67.1@31.546,54.623 v1@32.499,54.623 ; R67.1@31.636,54.712 Q19.1@31.636,58.318 ; v1(31.636,59.372) Q19.1@31.636,58.318 ; Q18.1@33.426,58.255 33.363,58.318 Q19.1@31.636,58.318 ; R68.1@33.567,54.61 33.554,54.623 v1(32.512,54.623) v1@32.499,54.623 ; v1(41.999,77.534) 43.015,77.534 R92.2@43.078,77.47 ; v1(63.691,27.241) R12.1@64.567,27.241 ; R46.1@71.425,42.863 71.425,42.755 68.192,39.522 60.667,39.522 59.283,38.138 46.901,38.138 32.499,52.54 32.499,52.705 v1@32.499,54.623 ; R59.1@72.834,54.687 72.847,54.674 R55.1@72.847,52.895 ; R10.1@95.656,40.817 R11.2@97.231,40.817 97.18,40.868 97.18,41.16 R43.2@98.591,42.57 98.591,44.806 100.089,46.304 108.077,46.304 ; U2.5@110.907,15.722 110.907,17.034 112.668,18.796 112.687,18.796 116.675,22.784 116.675,33.642 115.608,34.709 112.103,34.709 111.303,33.909 JTAG.8@111.303,32.868 108.369,32.868 R6.1@108.204,33.032 108.204,46.177 108.077,46.304 ; R13.1@115.15,67.361 115.608,66.903 115.608,51.308 110.604,46.304 108.077,46.304
  Mid-Layer 2 w0.5: v1(69.638,40.974) 103.196,40.974 JTAG.8@111.303,32.868
  Bottom Layer w0.5: v1(19.685,52.794) 21.565,54.673 ; 21.565,54.623 v1(32.512,54.623) ; v1(31.636,59.372) 31.636,71.603 37.567,77.534 v1(41.999,77.534) ; v1(61.646,39.535) 61.646,29.286 v1(63.691,27.241) ; v1(69.638,40.974) 69.791,41.127 69.791,50.728 v1(72.86,53.797)
"3V3 NFC": C62.2 C63.2 R80.1 R81.1 TP12.1 U7.25 U8.5 | length 39
  Top Layer w0.23: C63.2@63.703,6.846 C62.2@65.227,5.322 ; C62.2@65.357,5.192 U8.5@66.777,5.192
  Top Layer w0.254: R81.1@50.551,31.293 51.339,31.293 v1(51.377,31.331) 51.502,31.206 U7.25@51.502,29.504 ; R81.1@50.551,31.394 R80.1@50.551,33.02 ; v1(63.563,7.899) 63.563,7.112 C63.2@63.703,6.972
  Mid-Layer 2 w0.254: v1(51.377,31.331) 51.747,31.331 59.503,23.575 59.503,11.96 v1(63.563,7.899)
  Bottom Layer w0.254: TP12.1@63.551,9.296 63.551,7.912 v1(63.563,7.899)
5VUSB: C1.2 C64.1 C65.1 D5.1 K1.10 Q20.1 Q21.1 R8.1 R69.1 R71.1 R86.1 TP1.1 U1.53 U9.8 U10.1 U10.2 U10.3 U10.8 USB_A.4 | length 292.4
  Top Layer w0.23: U1.53@76.709,26.951 77.435,26.224 77.435,19.657 v1(79.273,17.818)
  Top Layer w0.508: U10.8@28.727,73.718 U10.1@28.727,68.218 U10.2@29.997,68.218 U10.3@31.267,68.218 ; R71.1@31.508,63.5 31.623,63.385 Q21.1@31.623,61.989 31.661,62.027 Q20.1@33.465,62.027 ; U9.8@37.236,73.806 35.611,72.181 35.611,71.768 34.29,70.448 C64.1@34.29,70.244 32.639,70.244 31.267,68.872 U10.3@31.267,68.218 ; R69.1@37.618,62.09 33.528,62.09 Q20.1@33.465,62.027 ; R86.1@72.39,10.325 C1.2@73.863,10.325 74.039,10.5 USB_A.4@81.45,10.5 81.45,9.126 85.788,4.788 109.068,4.788 R8.1@111.138,6.858 ; v1(89.637,70.65) 90.749,70.65 D5.1@91.981,71.882 103.106,83.007 K1.10@109.169,83.007 ; U10.3@31.267,68.218 31.267,67.45 33.261,65.456 33.261,62.23 Q20.1@33.465,62.027
  Mid-Layer 2 w0.508: v1(33.236,63.348) 40.408,70.519 52.099,70.519 54.889,67.729 86.716,67.729 v1(89.637,70.65)
  Bottom Layer w0.23: v1(79.273,17.818) 79.273,12.677 USB_A.4@81.45,10.5
  Bottom Layer w0.508: USB_A.4@81.45,10.5 81.45,8.199 84.861,4.788 104.165,4.788 107.531,8.153 107.531,43.917 116.751,53.137 116.751,69.266 113.144,72.873 113.144,79.032 K1.10@109.169,83.007
"24V GATE": R29.1 U1.23 | length 35.7
  Top Layer w0.23: 71.305,35.89 U1.23@71.759,35.436
  Top Layer w0.254: 71.305,35.89 71.305,36.494 v1(71.603,36.792) ; v1(74.358,51.892) 74.358,57.531 R29.1@82.956,66.129
  Bottom Layer w0.254: v1(71.603,36.792) 72.365,37.554 72.365,46.304 72.365,49.898 v1(74.358,51.892)
"36V GATE": R35.1 U1.24 | length 34.3
  Top Layer w0.23: 70.951,35.536 U1.24@71.405,35.082
  Top Layer w0.254: 70.951,35.536 70.848,35.64 70.848,37.218 v1(71.133,37.503) ; v1@75.425,52.845 75.425,56.782 80.912,62.269 R35.1@83.007,62.269
  Bottom Layer w0.254: v1(71.133,37.503) 71.882,38.252 71.882,50.307 74.42,52.845 v1(75.438,52.845)
"48V GATE": R41.1 U1.25 | length 32.8
  Top Layer w0.23: 70.598,35.183 U1.25@71.052,34.729
  Top Layer w0.254: v1(70.193,36.411) 70.193,35.588 70.598,35.183 ; v1@76.352,53.632 76.352,55.677 78.88,58.205 R41.1@83.007,58.205
  Bottom Layer w0.254: v1(70.193,36.411) 70.193,37.567 71.399,38.773 71.399,50.838 74.193,53.632 v1(76.365,53.632)
"ADC CHR": C29.1 U1.8 U4.1 U4.4 | length 36.3
  Top Layer w0.23: U1.8@78.123,34.729 79.373,35.979 102.032,35.979 104.292,38.24
  Top Layer w0.254: U4.4@101.702,44.58 103.612,42.67 U4.1@104.292,42.67 103.48,41.858 C29.1@103.48,40.805 103.798,40.805 104.292,40.31 104.292,38.24
"ADC PACK C": C33.1 U1.6 U5.1 U5.4 | length 32.5
  Top Layer w0.23: U1.6@78.83,34.022 79.534,34.726 80.179,34.726 v1(80.251,34.798)
  Top Layer w0.508: U5.4@58.954,44.541 60.864,42.631 U5.1@61.544,42.631 63.167,42.631 C33.1@63.297,42.761 63.297,42.316 v1(62.827,41.846)
  Bottom Layer w0.23: 63.221,35.89 65.329,33.782 79.235,33.782 v1(80.251,34.798)
  Bottom Layer w0.254: v1(62.827,41.846) 63.221,41.453 63.221,35.89
"ADC PACK D": C36.1 U1.7 U6.1 U6.4 | length 39
  Top Layer w0.23: U1.7@78.476,34.375 79.445,35.344 v1(79.629,35.344)
  Top Layer w0.254: v1(66.713,52.616) 66.713,53.439 U6.4@66.495,53.658 68.405,55.568 U6.1@68.405,56.068 ; U6.1@68.405,56.248 U6.1@68.405,56.068 ; C36.1@69.787,54.687 U6.1@68.405,56.068
  Bottom Layer w0.23: v1@66.675,52.578 66.675,35.674 68.134,34.215 78.5,34.215 v1(79.629,35.344)
ASK/OOK: U1.44 U7.12 | length 20.5
  Top Layer w0.23: 69.302,23.787 U1.44@72.44,26.925
  Top Layer w0.254: U7.12@53.609,24.568 54.39,23.787 69.302,23.787
"CHG GATE": R73.1 U1.26 | length 43.4
  Top Layer w0.23: U1.26@70.698,34.375 69.482,35.592 69.482,38.303 v1(73.457,42.278) ; R73.1@81.432,71.768 81.432,71.31 v1(81.966,70.777)
  Bottom Layer w0.23: v1@73.469,42.164 73.469,46.419 73.469,47.422 78.905,52.857 78.905,67.716 v1(81.966,70.777)
CHR_A0: U1.21 U3.1 | length 72.4
  Top Layer w0.23: U1.21@72.466,36.143 73.138,35.471 v1(73.66,35.471) ; U3.1@107.828,65.673 108.309,66.154 v1(108.877,66.154)
  Bottom Layer w0.23: v1(73.66,35.471) 75.908,37.719 75.908,45.618 ; 75.908,45.974 75.908,45.618 ; v1(108.877,66.154) 108.957,66.074 114.173,66.074 114.825,66.074 115.724,65.175 115.724,61.682 114.989,60.947 106.629,60.947 104.953,59.271 87.719,59.271 75.908,47.46 75.908,45.618
CHR_A1: U1.22 U3.16 | length 69.3
  Top Layer w0.23: U1.22@72.112,35.789 v1@73.053,34.849 ; v1(111.95,65.456) 112.168,65.673 U3.16@113.228,65.673
  Bottom Layer w0.23: v1@73.042,34.883 73.042,37.99 74.35,39.298 74.35,47.413 87.046,60.109 90.462,60.109 105.093,60.109 106.464,61.481 114.91,61.481 115.291,61.862 115.291,64.96 114.795,65.456 v1(111.95,65.456)
  other v1: 73.076,34.849
D+: R3.1 TP3.1 USB_A.2 | length 7.2
  Top Layer w0.5: USB_A.2@85.95,10.5 85.95,13.192 R3.1@86.766,14.009
  Bottom Layer w0.5: USB_A.2@85.95,10.5 85.95,11.934 TP3.1@87.325,13.31
D-: R2.2 TP2.1 USB_A.3 | length 13
  Top Layer w0.5: USB_A.3@83.95,10.5 83.95,9.611 84.734,8.826 86.525,8.826 87.347,9.648 87.347,13.014 R2.2@88.341,14.009 R2.2@88.341,13.64
  Bottom Layer w0.5: TP2.1@83.922,13.36 83.922,10.528 USB_A.3@83.95,10.5
DATA_CLK: U1.41 U7.26 | length 27.9
  Top Layer w0.23: v1(50.869,30.277) 50.795,30.203 50.795,29.504 U7.26@51.148,29.15 ; v1(69.177,25.997) 69.391,25.997 U1.41@71.405,28.011
  Bottom Layer w0.23: v1(50.869,30.277) 50.869,29.314 57.725,22.458 65.638,22.458 v1(69.177,25.997)
"DIS GATE": R103.2 U1.27 | length 56.5
  Top Layer w0.23: R103.2@22.339,54.598 26.861,50.076 33.299,50.076 48.157,35.218 69.148,35.218 U1.27@70.345,34.022
EN: U1.47 U7.28 | length 32.2
  Top Layer w0.23: v1(49.472,30.302) 49.472,29.412 50.157,28.727 ; 50.029,28.855 50.157,28.727 ; U7.28@50.441,28.443 50.157,28.727 ; v1@55.474,23.05 56.451,22.073 61.316,22.073 69.709,22.073 U1.47@73.527,25.89
  Bottom Layer w0.23: v1(49.472,30.302) 49.472,29.078 v1(55.448,23.101)
GND: C1.1 C2.2 C3.2 C4.1 C5.1 C6.1 C7.1 C8.2 C9.1 C10.1 C11.1 C12.1 C13.2 C14.2 C15.2 C16.2 C17.1 C18.2 C19.2 C20.1 C21.2 C22.2 C23.2 C27.2 C28.2 C29.2 C31.2 C32.2 C33.2 C34.2 C35.2 C36.2 C38.1 C39.2 C40.2 C41.2 C42.2 C43.2 C44.2 C45.2 C46.2 C47.2 C48.2 C49.2 C52.2 C53.2 C55.2 C57.2 C59.2 C60.1 C61.1 C62.1 C63.1 C64.2 C65.2 C66.1 CON1.6 D1.1 JTAG.7 K1.7 Q3.2 Q5.2 Q7.2 Q9.2 Q10.2 Q11.2 Q13.2 Q14.2 Q22.2 Q24.2 R4.2 R24.1 R25.1 R30.1 R31.1 R36.1 R37.1 R42.1 R45.2 R47.2 R49.1 R51.1 R52.1 R54.2 R56.2 R58.1 R60.1 R61.1 R74.1 R83.1 R85.2 R104.1 TP4.1 U1.0 U1.14 U1.16 U1.39 U1.49 U1.56 U2.2 U2.4 U3.3 U3.15 U4.2 U5.2 U6.2 U7.6 U7.7 U7.10 U7.15 U7.29 U7.33 U8.2 U8.4 U9.2 U9.3 U9.4 U9.5 U10.5 U11.3 U11.15 U11.16 USB_A.1 | length 807.1
  Top Layer w0.23: U7.29@50.087,28.048 U7.29@50.087,28.089 50.132,28.089 50.486,27.736 50.497,27.736 U7.33@51.854,26.379 ; U7.33@52.003,24.76 U7.10@52.902,23.861 53.625,23.138 ; U7.33@52.003,26.379 U7.33@52.003,26.527 53.771,26.527 U7.15@54.67,25.629 54.715,25.629 55.068,25.275 55.786,25.275 v1@55.822,25.311 ; 53.625,22.428 53.625,23.138 ; C47.2@58.108,18.784 57.078,17.755 54.59,17.755 53.625,18.72 53.625,23.138 ; C18.2@65.989,27.241 C18.2@66.105,27.357 ; C19.2@67.361,27.357 69.337,27.357 U1.39@70.698,28.718 70.708,28.718 71.15,29.16 72.201,29.16 U1.0@74.587,31.547 ; 75.159,36.157 74.625,36.69 74.625,36.888 U1.16@75.294,37.557 ; U1.49@75.294,25.536 74.852,25.978 74.852,26.859 76.887,28.894 ; U1.14@75.992,36.85 U1.14@76.001,36.85 74.587,35.436 U1.0@74.587,31.547 ; U1.56@77.769,28.011 77.193,28.588 74.587,31.193 U1.0@74.587,31.547 ; Q24.2@84.607,71.768 Q24.2@84.684,71.691
  Top Layer w0.508: Q22.2@18.732,56.426 18.911,56.248 R104.1@20.663,56.248 ; U10.5@32.525,73.73 v1(32.525,75.019) ; U10.5@32.537,73.718 34.29,71.965 C64.2@34.29,71.894 ; C65.2@35.611,70.244 37.592,70.244 38.506,69.329 U9.2@38.506,68.307 U9.3@39.776,68.307 U9.4@41.046,68.307 ; R83.1@44.043,4.928 C59.2@44.043,6.604 43.483,6.604 42.658,7.429 42.658,10.756 C53.2@44.043,12.141 C52.2@44.043,13.868 44.043,20.034 v1(44.379,20.371) C40.2@45.192,21.184 ; C39.2@45.103,34.62 44.417,34.62 43.617,33.82 43.617,31.293 C38.1@45.192,29.718 C44.2@45.192,28.296 C45.2@45.192,26.873 C43.2@45.192,25.451 C42.2@45.192,24.028 C41.2@45.192,22.606 C40.2@45.192,21.184 ; C66.1@45.292,77.47 45.466,77.297 45.466,73.825 45.447,73.806 U9.5@41.046,73.806 U9.4@41.046,68.307 ; U11.3@46.472,68.42 46.472,67.364 45.898,66.789 42.564,66.789 U9.4@41.046,68.307 ; R60.1@51.296,54.458 R61.1@51.296,56.388 ; U7.33@51.854,26.379 51.854,24.887 50.625,23.658 50.625,23.163 47.643,20.18 46.195,20.18 C40.2@45.192,21.184 ; v1(54.508,8.382) 55.129,8.382 55.243,8.268 ; C55.2@55.243,7.584 55.243,8.268 ; C57.2@55.243,9.081 55.243,8.268 ; C48.2@55.364,20.434 56.736,20.434 56.736,20.359 58.311,18.784 59.479,18.784 v1@60.381,18.784 ; U5.2@61.544,43.586 62.472,43.586 C33.2@63.297,44.411 63.297,44.387 64.719,42.965 C32.2@64.719,42.761 ; R52.1@62.078,56.248 62.078,56.046 R51.1@63.525,54.598 63.563,54.636 R58.1@64.96,54.636 ; C63.1@63.703,5.322 65.037,3.988 68.199,3.988 ; C62.1@65.227,6.972 66.647,6.972 U8.4@66.777,7.102 ; v1(65.341,26.454) 65.989,27.102 C18.2@65.989,27.241 C19.2@67.361,27.241 ; R49.1@66.091,42.761 C32.2@64.719,42.761 ; U8.4@67.015,7.102 U8.4@66.777,7.102 ; U6.2@67.45,56.248 67.45,56.973 C35.2@68.376,57.899 69.787,56.489 C36.2@69.787,56.337 C34.2@71.31,56.337 71.272,56.375 v1(71.272,57.213) ; 68.212,3.988 71.793,3.988 72.39,4.585 C60.1@72.39,5.373 73.812,5.373 C61.1@73.863,5.423 v1(74.842,5.423) 74.892,5.474 74.892,7.646 C1.1@73.863,8.675 ; 68.212,4.026 68.212,5.905 ; v1(69.012,43.764) 69.901,44.653 Q11.2@69.901,44.691 ; U8.2@69.367,6.147 68.453,6.147 67.732,6.147 U8.4@66.777,7.102 ; Q14.2@69.825,49.365 R56.2@71.17,49.365 ; 70.587,49.454 v1(70.587,50.102) ; v1(74.955,24.994) 75.267,25.305 ; Q13.2@74.968,49.352 74.054,48.438 74.054,46.801 74.83,46.025 R47.2@74.891,46.025 74.891,44.628 Q10.2@74.981,44.539 ; v1@74.981,43.65 Q10.2@74.981,44.539 ; Q13.2@75.096,49.225 R54.2@76.492,49.225 ; R45.2@76.517,44.411 75.108,44.411 Q10.2@74.981,44.539 ; C7.1@78.537,21.222 78.638,21.121 C8.2@83.566,21.121 85.25,21.121 D1.1@88.818,24.689 ; R74.1@82.855,71.768 Q24.2@84.607,71.768 ; R4.2@83.566,14.009 C3.2@85.141,14.009 ; 84.353,14.034 v1(84.353,14.732) ; R36.1@84.43,62.269 86.919,62.269 ; R30.1@84.43,66.129 85.928,66.129 Q5.2@86.055,66.002 86.893,65.164 86.893,62.434 86.919,62.409 86.919,58.941 Q9.2@86.004,58.026 ; R42.1@84.48,58.205 Q9.2@85.826,58.205 ; USB_A.1@88.45,10.5 88.45,12.492 C2.2@89.967,14.009 C5.1@91.592,14.009 C4.1@93.167,14.009 ; C17.1@90.983,40.805 92.558,40.805 C15.2@94.132,40.805 ; C15.2@94.17,40.843 v1(94.17,41.732) ; v1(98.349,56.883) 99.175,56.883 99.2,56.858 ; v1(98.361,65.087) 99.099,65.087 ; v1(98.374,61.074) 99.073,61.074 ; C13.2@98.755,40.817 100.076,40.817 101.738,39.155 C27.2@101.854,39.155 C29.2@103.48,39.155 ; R37.1@99.2,56.185 99.2,56.858 ; C23.2@99.2,57.556 99.2,56.858 ; R31.1@99.2,60.35 C22.2@99.2,61.722 ; C21.2@99.2,64.516 R25.1@99.2,65.938 ; U4.2@104.214,43.703 U4.2@104.292,43.625 105.22,43.625 C28.2@106.045,42.8 v1(106.045,41.504) C6.1@106.045,33.032 ; U3.3@107.828,64.373 106.467,64.373 105.931,64.91 105.931,66.37 v1(106.921,67.361) C20.1@107.989,67.361 ; R24.1@108.204,49.569 108.331,49.441 Q3.2@109.931,49.441 ; Q3.2@109.944,49.454 v1(110.807,49.454) ; U2.2@111.862,13.132 111.862,14.199 ; C11.1@112.636,17.323 112.636,15.903 U2.4@112.817,15.722 112.817,14.379 112.763,14.326 ; C9.1@112.788,8.28 C10.1@112.788,9.754 114.046,11.011 114.046,13.411 113.132,14.326 112.763,14.326 ; U3.15@113.228,65.023 114.212,65.023 v1(114.516,64.719) ; JTAG.7@113.843,32.868 115.202,31.509 115.202,22.961 111.037,18.796 111.012,18.796 109.69,17.473 109.69,14.668 110.033,14.326 112.763,14.326 ; C31.2@60.694,40.969 63.384,40.969 64.719,42.304 C32.2@64.719,42.761 ; C31.2@60.694,40.969 60.667,40.969 C31.2@60.667,40.996 C31.2@60.694,40.969
  Top Layer w1: v1(37.922,3.912) 37.922,22.428 37.313,23.038 3.162,23.038 2.337,22.212 2.337,2.667 2.73,2.273 38.278,2.273 39.23,3.226 39.23,23.597 38.532,24.295 1.816,24.295 1.072,23.551 1.072,1.791 1.791,1.072 R85.2@48.514,1.072
  Mid-Layer 1 w0.508: 73.635,2.121 88.163,2.121 ; 89.2,75.549 CON1.6@89.2,83 101.556,83 K1.7@109.169,75.387
  Bottom Layer w0.508: v1(65.341,26.454) 65.341,25.184 TP4.1@65.38,25.146
  Bottom Layer w1: v1(37.922,3.912) 37.922,2.896 37.274,2.248 2.718,2.248 2.362,2.603 2.362,22.073 3.353,23.063 37.541,23.063 39.179,21.425 39.179,2.126 38.125,1.072 1.676,1.072 1.072,1.676 1.072,23.741 1.626,24.295 v1@41.808,24.295
  other v1: 44.502,2.248 49.584,2.248 54.675,2.248 59.742,2.248 64.811,2.248 69.829,2.248 74.87,2.248 41.808,4.108 41.808,9.139 71.209,10.427 67.716,13.957 41.808,14.199 64.097,17.412 60.394,18.796 41.808,19.214 60.693,21.095 41.808,24.282 55.758,25.298 3.986,27.289 9.01,27.289 14.016,27.289 18.99,27.289 24.022,27.289 29.056,27.289 34.072,27.289 39.027,27.289 1.054,28.445 1.054,33.52 41.834,34.264 2.07,36.281 7.12,36.281 12.133,36.281 17.141,36.281 22.087,36.281 27.002,36.281 31.992,36.281 36.957,36.281 41.991,36.281 45.579,36.281 101.079,39.878 61.633,41.021 74.968,43.637 62.814,55.397 51.27,55.448 19.71,56.248 86.881,65.037 83.795,71.768 44.171,73.806
"I/O 0": U1.37 U7.17 | length 16
  Top Layer w0.23: U7.17@54.958,27.007 56.302,28.352 68.918,28.352 U1.37@69.991,29.425
"I/O 1": U1.36 U7.18 | length 16
  Top Layer w0.23: U7.18@54.604,27.361 56.123,28.88 68.738,28.88 U1.36@69.637,29.779
"I/O 2": U1.33 U7.19 | length 16.7
  Top Layer w0.23: U7.19@54.251,27.714 57.376,30.84 58.534,30.84 ; 57.493,30.84 58.534,30.84 ; U1.33@68.577,30.84 58.534,30.84
"I/O 3": U1.32 U7.20 | length 17
  Top Layer w0.23: U7.20@53.897,28.068 58.786,32.956 67.874,32.956 U1.32@68.577,32.254
"I/O 4": U1.31 U7.21 | length 18.5
  Top Layer w0.23: U7.21@53.543,28.421 58.599,33.477 68.061,33.477 U1.31@68.93,32.607 ; 68.492,33.045 U1.31@68.93,32.607 ; U1.31@68.981,32.557 U1.31@68.93,32.607
"I/O 5": U1.30 U7.22 | length 18.7
  Top Layer w0.23: U7.22@53.19,28.775 53.19,28.82 53.543,29.174 53.543,29.206 58.256,33.919 68.326,33.919 U1.30@69.284,32.961
"I/O 6": U1.29 U7.23 | length 19.4
  Top Layer w0.23: 58.048,34.34 58.06,34.352 68.6,34.352 U1.29@69.637,33.315
  Top Layer w0.254: U7.23@52.836,29.129 56.774,33.066 58.048,34.34